# EAGLE board srijan tasks2 board (EAGLE 9.6.2)

Size 54.28 x 52.06 mm. Coordinates in mm from the lower left corner, seen from the top.
Outline: 0,0 54.28,0 54.28,52.06 0,52.06 0,0
Copper layers (1*16): Top 0.035mm / dielectric 1.5mm / Bottom 0.035mm
Design rules "default": minimum track width 6mil, minimum drill 0.35mm, track to track 6mil, track to pad 6mil, pad to pad 6mil, via to via 6mil, smd to smd 6mil, copper to edge 40mil, drill to drill 6mil, minimum pad ring 10mil, minimum via ring 8mil, stop-mask expansion 4mil, vias tented up to drill 0mil, thermal gap 10mil

## Footprints (pad centres in the part's own frame; a part is rotated, then mirrored left to right if it is on the bottom)
E2,5-5 = drill 0.813 pad 1.6: + -1.27,0 | drill 0.813 pad 1.6 octagon: - 1.27,0
DO41-10 = drill 1.118 pad 1.93: A 5.08,0; C -5.08,0
TO220H = drill 1.118 long: 1 -2.54,-10.16; 2 0,-10.16; 3 2.54,-10.16 | hole 3.302: 0,4.826
LED3MM = drill 0.813 pad 1.676 octagon: A -1.27,0; K 1.27,0
0204/7 = drill 0.813 pad 1.676 octagon: 1 -3.81,0; 2 3.81,0
233-102 = drill 1.2 long: A1 -1.25,2.5; A2 1.25,2.5; B1 -1.25,-2.5; B2 1.25,-2.5

## Placement (x,y rotation side)
C1  220 uF  [E2,5-5]  36.83,17.78 0 top
C2  0.1 uF  [E2,5-5]  29.21,12.7 0 top
C3  10 uF  [E2,5-5]  29.21,6.35 0 top
D1  1N4004  [DO41-10]  30.48,25.4 270 top
D2  1N4004  [DO41-10]  5.08,25.4 270 top
D3  1N4004  [DO41-10]  17.78,25.4 90 top
D4  1N4004  [DO41-10]  11.43,25.4 90 top
IC1  7805T  [TO220H]  44.45,40.64 0 top
LED1  [LED3MM]  16.51,16.51 0 top
R1  470 E  [0204/7]  8.89,11.43 270 top
X1  [233-102]  46.99,16.51 0 top
X2  [233-102]  31.75,43.18 180 top

## Library data of the parts
C1-C3 D1-D4 IC1 LED1 R1 = adafruit
X1 X2 = con-wago; MPN: 233-102; OC_FARNELL: unknown; OC_NEWARK: 28K9044

## Nets
N$2: C1.- C2.- C3.- D1.A D2.A IC1.2 LED1.K X1.B1
N$3: D1.C D3.A X2.B1
N$5: C1.+ D3.C D4.C IC1.1
N$6: D2.C D4.A X2.B2
N$8: C2.+ C3.+ IC1.3 R1.2 X1.B2
N$12: LED1.A R1.1

## Tracks (layer width: path | path; a pad name or v marks a point on that pad's centre or on a via)
N$2  (7 unrouted)
N$3  (2 unrouted)
N$5  (3 unrouted)
N$6  (2 unrouted)
N$8  (4 unrouted)
N$12  (1 unrouted)